# Altium PCB VanAtta_Switch_TB.PcbDoc (part 2 of 2)
Units mil, origin at the board's own origin, x right, y up, seen from the top; angles counter-clockwise.
Board outline 5090 x 7845 mil, 4 copper layers (Top Layer, Int (GND), Int (PWR), Bottom Layer), stack 53.912 mil thick; 128 components, 107 nets, 607 pads, 288 vias.
Unrouted connection lines stored in the file: 160.
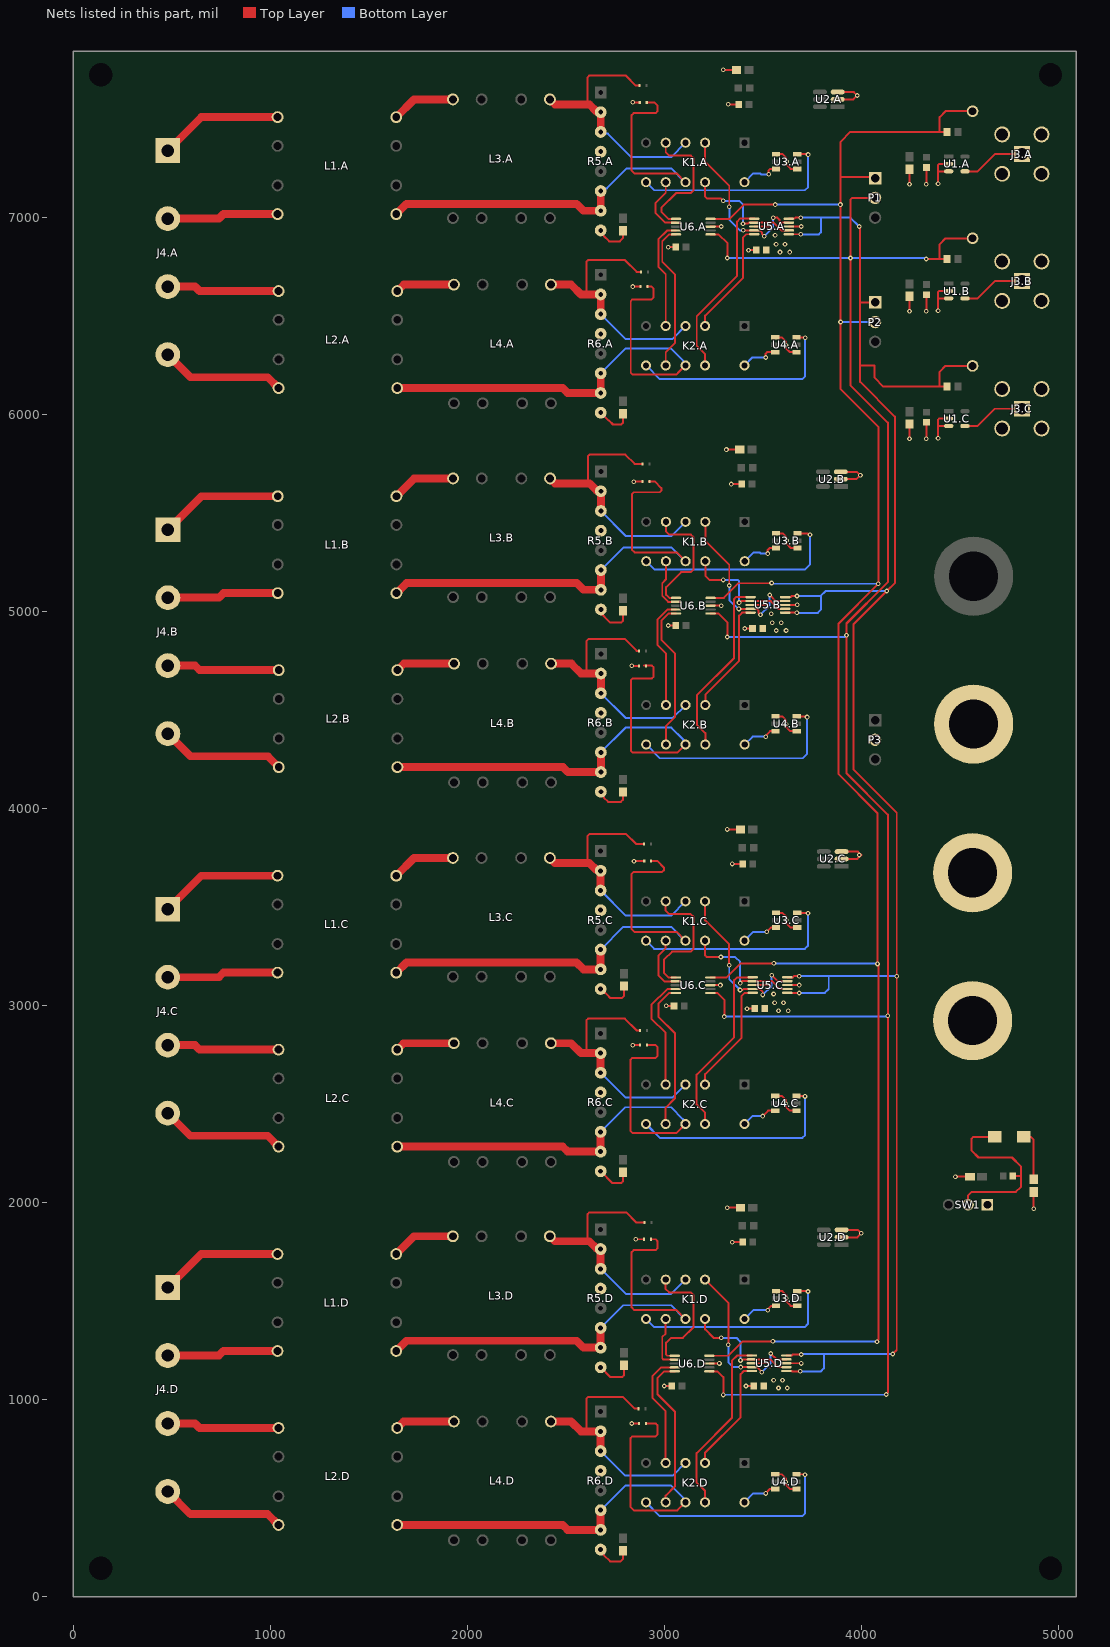
[diagram p4: the nets of this part, all layers, seen from the top]

## Via types
v1: diameter 24, hole 12, Top Layer to Bottom Layer, tented both sides, 288 vias

## Nets (pads, with @x,y where several pads share a name; then routed paths per layer and width w, separated by ;. In a path a pad name is that pad's centre, name@x,y a point inside that pad or via, vN(x,y) a via of type N, cw(c..) or ccw(c..) an arc to the next point about the centre after c; other vN are vias at no path point) (continued)
GND: C1.2 C2.A.2 C2.B.2 C2.C.2 C3.A.1 C3.B.1 C3.C.1 C4.A.2 C4.B.2 C4.C.2 C4.D.2 C5.A.1 C5.B.1 C5.C.1 C5.D.1 C6.A.2 C6.B.2 C6.C.2 C6.D.2 C7.A.2 C7.B.2 C7.C.2 C7.D.2 C8.A.2 C8.B.2 C8.C.2 C8.D.2 C9.A.2 C9.B.2 C9.C.2 C9.D.2 D2.A.2 D2.B.2 D2.C.2 D2.D.2 D4.A.2 D4.B.2 D4.C.2 D4.D.2 J1.2 J2.2 J3.A.2 J3.A.3 J3.A.4 J3.A.5 J3.B.2 J3.B.3 J3.B.4 J3.B.5 J3.C.2 J3.C.3 J3.C.4 J3.C.5 R2.2 R5.A.4 R5.A.8 R5.B.4 R5.B.8 R5.C.4 R5.C.8 R5.D.4 R5.D.8 R6.A.4 R6.A.8 R6.B.4 R6.B.8 R6.C.4 R6.C.8 R6.D.4 R6.D.8 SW1.1 U1.A.2 U1.A.3 U1.B.2 U1.B.3 U1.C.2 U1.C.3 U2.A.2 U2.A.3 U2.B.2 U2.B.3 U2.C.2 U2.C.3 U2.D.2 U2.D.3 U3.A.1 U3.A.4 U3.B.1 U3.B.4 U3.C.1 U3.C.4 U3.D.1 U3.D.4 U4.A.1 U4.A.4 U4.B.1 U4.B.4 U4.C.1 U4.C.4 U4.D.1 U4.D.4 U5.A.3 U5.B.3 U5.C.3 U5.D.3 U6.A.3 U6.B.3 U6.C.3 U6.D.3 | length 6504.2
  Top Layer w10: R6.D.8@2677.36,240 2677.36,228.04 2693.3,212.1 2693.3,211.7 2725,180 2778.47,180 2790,191.53 C7.D.2@2790,235 ; R5.D.8@2677.36,1165 2727.36,1115 2786.21,1115 2795,1123.79 C6.D.2@2795,1175 ; R6.C.8@2677.36,2160 2737.36,2100 2781.21,2100 2790,2108.79 C7.C.2@2790,2155 ; R5.C.8@2677.36,3085 2680,3085 2720.01,3044.99 2725,3040 2786.21,3040 2795,3048.79 C6.C.2@2795,3100 ; R6.A.8@2677.64,6010 2717.64,5970 2720,5970 2740,5950 2781.21,5950 2790,5958.79 C7.A.2@2790,6005 ; R5.A.8@2677.64,6935 2677.64,6923.23 2693.67,6907.19 2693.67,6906.79 2720.46,6880 2774.5,6880 2790,6895.5 C6.A.2@2790,6933.43 ; R6.B.8@2678.39,4086.18 2678.39,4074 2693.23,4059.16 2693.23,4056.77 2715,4035 2780,4035 2790,4045 C7.B.2@2790,4085 ; R5.B.8@2678.39,5011.18 2687,5002.57 2687,4983.2 2708.5,4961.7 2708.5,4961.5 2725,4945 2781.21,4945 2790,4953.79 C6.B.2@2790,5005 ; v1(2835,880) D4.D.2@2872.28,880 ; v1(2835,4725) D4.B.2@2872.28,4725 ; v1(2840,2800) D4.C.2@2877.01,2800 ; v1(2840,6650) D4.A.2@2879.25,6650 ; v1(2840,7585) D2.A.2@2875,7585 ; v1(2845,5660) 2846.18,5661.18 D2.B.2@2890,5661.18 ; v1(2846.89,3733.11) 2849.33,3733.11 2851.22,3735 D2.C.2@2897.83,3735 ; v1(2855,1815) D2.D.2@2897.28,1815 ; v1(2999.74,1070) C9.D.2@3038.78,1070 ; v1(3010.37,3000) C9.C.2@3049.41,3000 ; v1(3020,6850) C9.A.2@3059.41,6850 ; v1(3020.37,4930) C9.B.2@3059.41,4930 ; U6.D.3@3229.37,1184.37 3279.37,1184.37 v1(3280,1185) ; U6.C.3@3234.37,3104.37 3284.37,3104.37 v1(3285,3105) ; U6.B.3@3235,5030.63 3289.37,5030.63 v1(3290,5030) ; U6.A.3@3235,6954.37 3289.37,6954.37 v1(3290,6955) ; v1(3300,7750) C4.A.2@3366.86,7750 ; v1(3315.61,5822.6) C4.B.2@3382.48,5822.6 ; v1(3320,1975) C4.D.2@3386.86,1975 ; v1(3320,3895) C4.C.2@3386.86,3895 ; v1(3325,7575) C5.A.1@3378.82,7575 ; v1(3340.61,5647.6) C5.B.1@3394.43,5647.6 ; v1(3345,1800) C5.D.1@3398.82,1800 ; v1(3345,3720) C5.C.1@3398.82,3720 ; v1(3408.4,4914.37) C8.B.2@3447.81,4914.37 ; v1(3415,1070) C8.D.2@3454.41,1070 ; v1@3425,2985 C8.C.2@3459.41,2985 ; v1@3432.6,6835 C8.A.2@3467.01,6835 ; U4.D.1@3563.23,622.4 3596.76,622.4 3617.36,601.8 v1(3617.4,582.67) 3617.36,568.2 3637.96,547.6 U4.D.4@3671.5,547.6 ; U4.C.1@3563.23,2542.4 3596.76,2542.4 3617.36,2521.8 v1(3617.4,2502.67) 3617.36,2488.2 3637.96,2467.6 U4.C.4@3671.5,2467.6 ; U4.A.1@3563.5,6392.4 3597.04,6392.4 3617.64,6371.8 3617.64,6352.67 3617.64,6338.2 3638.24,6317.6 U4.A.4@3671.77,6317.6 ; U4.B.1@3564.25,4468.58 3597.79,4468.58 3618.39,4447.98 v1(3618.42,4428.85) 3618.39,4414.38 3638.98,4393.78 U4.B.4@3672.52,4393.78 ; U3.D.1@3566.54,1551.81 3600.07,1551.81 3620.67,1531.21 3620.67,1515 3620.67,1497.61 3641.27,1477.01 U3.D.4@3674.8,1477.01 ; U3.C.1@3566.54,3471.81 3600.07,3471.81 3620.67,3451.21 3620.67,3435 3620.67,3417.61 3641.27,3397.01 U3.C.4@3674.8,3397.01 ; U3.A.1@3566.81,7321.81 3600.35,7321.81 3620.94,7301.21 3620.94,7285 3620.94,7267.61 3641.54,7247.01 U3.A.4@3675.08,7247.01 ; U3.B.1@3567.56,5397.99 3601.1,5397.99 3621.69,5377.39 3621.69,5361.18 3621.69,5343.79 3642.29,5323.19 U3.B.4@3675.83,5323.19 ; U5.B.3@3613.4,5034.37 v1@3674.37,5034.37 ; U5.D.3@3620,1185.63 v1@3694.37,1185.63 ; U5.C.3@3625,3105 v1(3685,3105) ; U5.A.3@3632.6,6955 v1(3695,6955) ; U2.A.2@3880.29,7600 3960,7600 v1(3980,7620) 3962.6,7637.4 U2.A.3@3880.29,7637.4 ; U2.B.2@3895.91,5672.6 3975.61,5672.6 v1(3995.61,5692.6) 3978.21,5710 U2.B.3@3895.91,5710 ; U2.D.2@3900.29,1825 3980,1825 v1(4000,1845) 3982.6,1862.4 U2.D.3@3900.29,1862.4 ; U2.C.2@3900.29,3745 3980,3745 3995.05,3760.05 4000,3765 v1@3995.05,3769.95 ; U2.C.3@3900.29,3782.4 3982.6,3782.4 v1@3995.05,3769.95 ; v1(3990.1,3765) v1@3995.05,3769.95 ; v1(4245,5877.56) C2.C.2@4245,5952.56 ; v1(4245,6525) C2.B.2@4245,6600 ; v1(4245,7170) C2.A.2@4245,7245 ; v1(4330,5877.56) C3.C.1@4330,5961.97 ; v1(4330,6525) C3.B.1@4330,6609.41 ; v1(4330,7170) C3.A.1@4330,7254.41 ; v1(4390,5880) 4389.14,5880.86 4389.14,5942.5 ; v1(4390,6527.44) 4389.14,6528.3 4389.14,6589.94 ; v1(4390,7172.44) 4389.14,7173.3 4389.14,7234.94 ; U1.C.3@4443.64,5942.6 4418.92,5942.6 4418.82,5942.5 4389.14,5942.5 ; U1.C.2@4443.64,5980 4395,5980 4389.14,5974.14 4389.14,5942.5 ; U1.B.3@4443.64,6590.04 4418.92,6590.04 4418.82,6589.94 4389.14,6589.94 ; U1.B.2@4443.64,6627.44 4395,6627.44 4389.14,6621.58 4389.14,6589.94 ; U1.A.3@4443.64,7235.04 4418.92,7235.04 4418.82,7234.94 4389.14,7234.94 ; U1.A.2@4443.64,7272.44 4395,7272.44 4389.14,7266.58 4389.14,7234.94 ; v1(4477.75,2132.5) C1.2@4551.3,2132.5 ; v1(4875,1970) R2.2@4875,2054.99
  other v1: 3695,1185 3619.72,1515 3420,2985 3619.72,3435 3675,5035 3620.75,5361.18 3617.68,6352.67 3427.6,6835 3620,7285
"LD1_Signal Processing1": P1.1 P2.2 R3.A.2 TP1.A.1 U6.A.5 U6.B.5 U6.C.5 U6.D.5 | length 10824.4
  Top Layer w10: U6.D.5@3229.37,1223.74 3324.37,1223.74 3397.41,1296.78 v1(3551.52,1296.78) ; U6.C.5@3234.37,3143.74 3316.84,3143.74 3388.1,3215 v1@3557.4,3215 ; U6.B.5@3235,5070 3302.13,5070 3376.5,5144.37 v1@3545.8,5144.37 ; U6.A.5@3235,6993.74 3332,6993.74 3404.41,7066.15 v1(3564.11,7066.15) ; P1.1@4055,7200 4050,7205 3895,7205 ; v1(4080,1295) 4080,1298.79 4086.71,1305.5 v1@4086.71,3212.36 ; v1(4082.29,3212.36) 4082.29,3977.71 3885,4175 3885,4940.07 v1(4086.71,5141.78) 4086.71,5938.29 3895,6130 v1(3895,6470) 3894.56,6470.44 3894.56,7065.71 3895,7066.15 3895,7205 ; R3.A.2@4434.88,7435 4397.48,7435 ; TP1.A.1@4565,7540 4427.56,7540 4397.48,7509.92 4397.48,7435 ; 3895,7205 3895,7385 3945,7435 4397.48,7435
  Bottom Layer w10: v1@3544.92,5141.78 v1(4086.71,5141.78) ; v1(3551.52,1296.78) 3552.41,1295.89 4079.11,1295.89 v1(4080,1295) ; v1(3556.52,3216.15) 3558.41,3214.25 4080.39,3214.25 v1(4082.29,3212.36) ; v1(3564.11,7066.15) v1(3894.11,7066.15) ; v1(3895,6470) P2.2@4070,6470
  other v1: 3544.92,5145.52
"LD2_Signal Processing1": P1.2 R3.B.2 TP1.B.1 U6.A.1 U6.B.1 U6.C.1 U6.D.1 | length 10775.2
  Top Layer w10: U6.D.1@3229.37,1145 3270,1145 3300,1115 v1(3300,1025) ; U6.C.1@3234.37,3065 3270,3065 3305,3030 v1(3305,2945) ; U6.B.1@3235,4991.26 3273.74,4991.26 3321.21,4943.79 3321.21,4872.47 v1(3320,4871.26) ; U6.A.1@3235,6915 3275,6915 3321.21,6868.79 3321.21,6796.21 v1(3320,6795) ; P1.2@4055,7100 3955,7100 3945,7090 v1(3945,6795) 3945,6150 4135,5960 4135,5150 3925,4940 v1(3925,4880) 3925,4180 4135,3970 v1(4135,2950) 4135,1036.88 4126.71,1028.59 v1(4126.71,1026.78) ; v1(4330,6790) 4397.48,6790 ; R3.B.2@4434.88,6790 4397.48,6790 ; TP1.B.1@4565,6895 4427.56,6895 4397.48,6864.92 4397.48,6790
  Bottom Layer w10: v1(3300,1025) 3300.89,1025.89 4125.82,1025.89 v1@4126.71,1025 ; v1(3305,2945) 4126.21,2945 4131.21,2950 v1(4135,2950) ; v1(3320,4871.26) 3915.36,4871.26 3924.1,4880 v1(3925,4880) ; v1(3320,6795) v1(3945,6795) 4321.21,6795 4326.21,6790 v1(4330,6790)
LED: LED1.1 R2.1 | length 256.5
  Top Layer w10: LED1.1@4825,2335 4860.45,2335 4875,2320.45 R2.1@4875,2120
"N1+_Input and Relays1": D1.A.2 K1.A.4 L3.A.5 R5.A.2 R5.A.3 | length 1327
  Top Layer w10: 2620,7575 2611.23,7583.77 2611.23,7712.44 2620.02,7721.23 2803.77,7721.23 2855,7670 D1.A.2@2874.57,7670
  Top Layer w40: L3.A.5@2419.76,7600 2444.76,7575 2620,7575 2656.17,7538.83 2673.81,7538.83 R5.A.2@2677.64,7535 R5.A.3@2677.64,7435
  Bottom Layer w10: R5.A.3@2677.64,7435 2686.25,7426.39 2713.61,7426.39 2832.64,7307.36 3035,7307.36 K1.A.4@3107.64,7380
"N1+_Input and Relays2": D1.B.2 K1.B.4 L3.B.5 R5.B.2 R5.B.3 | length 1339.7
  Top Layer w10: 2620.75,5651.18 2611.98,5659.95 2611.98,5788.62 2620.76,5797.41 2802.59,5797.41 2850,5750 D1.B.2@2889.57,5750
  Top Layer w40: L3.B.5@2420.51,5676.18 2445.51,5651.18 2620.75,5651.18 2656.92,5615.01 2674.56,5615.01 R5.B.2@2678.39,5611.18 R5.B.3@2678.39,5511.18
  Bottom Layer w10: R5.B.3@2678.39,5511.18 2806.02,5383.54 3035.75,5383.54 K1.B.4@3108.39,5456.18
"N1+_Input and Relays3": D1.C.2 K1.C.4 L3.C.5 R5.C.2 R5.C.3 | length 1350.4
  Top Layer w10: 2619.72,3725 2610.95,3733.77 2610.95,3862.44 2619.74,3871.23 2806.76,3871.23 2857.01,3820.98 2857.01,3820.37 2890,3820.37 2890.38,3820 D1.C.2@2897.28,3820
  Top Layer w40: L3.C.5@2419.49,3750 2444.49,3725 2619.72,3725 2655.9,3688.83 2673.54,3688.83 R5.C.2@2677.36,3685 R5.C.3@2677.36,3585
  Bottom Layer w10: R5.C.3@2677.36,3585 2805,3457.36 3034.72,3457.36 K1.C.4@3107.36,3530
"N1+_Input and Relays4": D1.D.2 K1.D.4 L3.D.5 R5.D.2 R5.D.3 | length 1352.3
  Top Layer w10: 2619.72,1805 2610.95,1813.77 2610.95,1942.44 2619.74,1951.23 2806.76,1951.23 2857.99,1900 D1.D.2@2899.57,1900
  Top Layer w40: L3.D.5@2419.49,1830 2444.49,1805 2619.72,1805 2655.9,1768.83 2673.54,1768.83 R5.D.2@2677.36,1765 R5.D.3@2677.36,1665
  Bottom Layer w10: R5.D.3@2677.36,1665 2805,1537.36 3034.72,1537.36 K1.D.4@3107.36,1610
"N1+_iso_Input and Relays1": J4.A.1 L1.A.1 | length 627.8
  Top Layer w40: J4.A.1@480.28,7340 650.28,7510 L1.A.1@1037.64,7510
"N1+_iso_Input and Relays2": J4.B.1 L1.B.1 | length 627.8
  Top Layer w40: J4.B.1@481.02,5416.18 651.02,5586.18 L1.B.1@1038.39,5586.18
"N1+_iso_Input and Relays3": J4.C.1 L1.C.1 | length 627.8
  Top Layer w40: J4.C.1@480,3490 650,3660 L1.C.1@1037.36,3660
"N1+_iso_Input and Relays4": J4.D.1 L1.D.1 | length 627.8
  Top Layer w40: J4.D.1@480,1570 650,1740 L1.D.1@1037.36,1740
"N1+L_Input and Relays1": K1.A.5 U6.A.6 | length 674.2
  Top Layer w10: K1.A.5@3007.64,7380 3007.64,7332.36 3025,7315 3134.76,7315 3148.73,7301.03 3148.73,7138.97 3134.76,7125 3060,7125 2985,7050 2985,7030 3021.26,6993.74 U6.A.6@3059.8,6993.74
"N1+L_Input and Relays2": K1.B.5 U6.B.6 | length 636.3
  Top Layer w10: K1.B.5@3008.39,5456.18 3008.39,5408.54 3025.75,5391.18 3135.51,5391.18 3149.48,5377.21 3149.48,5215.15 3135.51,5201.18 3086.18,5201.18 3010,5125 3010,5085.46 3025.46,5070 U6.B.6@3059.8,5070
"N1+L_Input and Relays3": K1.C.5 U6.C.6 | length 672.6
  Top Layer w10: K1.C.5@3007.36,3530 3007.36,3482.36 3024.72,3465 3134.48,3465 3148.45,3451.03 3148.45,3288.97 3134.48,3275 3040,3275 3000,3235 3000,3165 3021.26,3143.74 U6.C.6@3059.17,3143.74
"N1+L_Input and Relays4": K1.D.5 U6.D.6 | length 641.9
  Top Layer w10: K1.D.5@3007.36,1610 3007.36,1562.36 3024.72,1545 3134.48,1545 3148.45,1531.03 3148.45,1368.97 3094.48,1315 3035,1315 3010,1290 3010,1229.6 3015.86,1223.74 U6.D.6@3054.17,1223.74
"N1+VA_Input and Relays1": K1.A.3 U5.A.4 U5.A.9 | length 866.7
  Top Layer w10: K1.A.3@3207.64,7380 3207.64,7283.79 3330,7161.42 v1@3330,7055 ; v1@3400.94,6935.31 3485.12,6935.31 3496.98,6923.46 3496.98,6915.62 v1(3507.6,6905) ; v1(3552.6,6999.68) 3574.46,6999.68 3585,6989.14 3585,6980.54 3590.86,6974.68 U5.A.4@3632.6,6974.68
  Bottom Layer w10: v1(3330.63,7055.63) 3330.63,6989.37 3384.37,6935.63 v1(3400.63,6935.63) ; v1(3507.6,6905) 3552.6,6950 v1(3552.6,6999.68)
"N1+VA_Input and Relays2": K1.B.3 U5.B.4 U5.B.9 | length 854.4
  Top Layer w10: K1.B.3@3208.39,5456.18 3208.39,5359.97 3330,5238.35 3330,5133.22 v1(3329.65,5132.87) ; v1@3379.47,5014.68 3469.69,5014.68 3477.78,5006.59 3477.78,4994.99 v1(3488.4,4984.37) ; v1(3535,5085) 3535.46,5085 3566.4,5054.06 U5.B.4@3613.4,5054.06
  Bottom Layer w10: v1(3329.65,5132.87) 3330.63,5131.89 3330.63,5059.01 3375.44,5014.21 v1(3378.99,5014.21) ; v1(3488.4,4984.37) 3535,5030.97 v1(3535,5085)
"N1+VA_Input and Relays3": K1.C.3 U5.C.4 U5.C.9 | length 873.8
  Top Layer w10: K1.C.3@3207.36,3530 3207.36,3433.79 3329.72,3311.42 v1@3329.72,3205 ; v1(3385,3080) 3385.73,3080.73 3398,3080.73 3402.58,3085.31 U5.C.9@3449.8,3085.31 3477.38,3085.31 3477.69,3085 3485,3085 3500,3070 v1(3500,3055) ; v1(3545,3155) 3575.31,3124.69 U5.C.4@3625,3124.69
  Bottom Layer w10: v1(3330,3205.63) 3330,3135 v1(3385,3080) ; v1(3500,3055) 3545,3100 v1(3545,3155)
"N1+VA_Input and Relays4": K1.D.3 U5.D.4 U5.D.9 | length 865.9
  Top Layer w10: K1.D.3@3207.36,1610 3325,1492.36 v1(3325,1280) ; v1@3388.35,1165.94 U5.D.9@3444.8,1165.94 3472.52,1165.94 3495,1143.47 v1(3495,1140) ; v1(3540,1235) 3569.69,1205.31 U5.D.4@3620,1205.31
  Bottom Layer w10: v1(3325,1280) 3325,1191.87 3350.61,1166.26 v1(3388.03,1166.26) ; v1(3495,1140) 3540,1185 v1(3540,1235)
"N1- L_Input and Relays1": D2.A.1 K1.A.9 L1.A.5 R5.A.6 R5.A.7 | length 2486.4
  Top Layer w10: D2.A.1@2912.4,7585 2950,7585 2965,7570 2965,7538.79 2956.21,7530 2845,7530 2835,7520 2835,7238.79 2848.79,7225 3062.64,7225 K1.A.9@3107.64,7180
  Top Layer w40: L1.A.5@1640,7017.87 1692.13,7070 2555,7070 2590,7035 R5.A.7@2677.64,7035 R5.A.6@2677.64,7135
  Bottom Layer w10: R5.A.6@2677.64,7135 2689.81,7135 2703.26,7148.44 2708.44,7148.44 2810,7250 3035,7250 3105,7180 K1.A.9@3107.64,7180
"N1- L_Input and Relays2": D2.B.1 K1.B.9 L1.B.5 R5.B.6 R5.B.7 | length 2505.6
  Top Layer w10: D2.B.1@2921.96,5661.18 D2.B.1@2924.45,5661.18 ; D2.B.1@2925.43,5661.18 2952,5661.18 2985.79,5627.39 2985.79,5614.97 2977,5606.18 2845.75,5606.18 2835.75,5596.18 2835.75,5314.97 2849.53,5301.18 3063.39,5301.18 K1.B.9@3108.39,5256.18
  Top Layer w40: L1.B.5@1640.75,5094.06 1692.87,5146.18 2555.75,5146.18 2590.75,5111.18 R5.B.7@2678.39,5111.18 R5.B.6@2678.39,5211.18
  Bottom Layer w10: R5.B.6@2678.39,5211.18 2793.39,5326.18 3035.75,5326.18 3105.75,5256.18 K1.B.9@3108.39,5256.18
"N1- L_Input and Relays3": D2.C.1 K1.C.9 L1.C.5 R5.C.6 R5.C.7 | length 2524.3
  Top Layer w10: D2.C.1@2933.26,3735 2932.28,3735 2965,3735 2998.79,3701.21 2998.79,3688.79 2990,3680 2844.72,3680 2834.72,3670 2834.72,3388.79 2848.51,3375 3062.36,3375 K1.C.9@3107.36,3330
  Top Layer w40: L1.C.5@1639.72,3167.87 1691.85,3220 2554.72,3220 2589.72,3185 R5.C.7@2677.36,3185 R5.C.6@2677.36,3285
  Bottom Layer w10: R5.C.6@2677.36,3285 2792.36,3400 3034.72,3400 3104.72,3330 K1.C.9@3107.36,3330
"N1- L_Input and Relays4": D2.D.1 K1.D.9 L1.D.5 R5.D.6 R5.D.7 | length 2470
  Top Layer w10: D2.D.1@2932.72,1815 2956.21,1815 2965,1806.21 2965,1768.79 2956.21,1760 2844.72,1760 2834.72,1750 2834.72,1468.79 2848.51,1455 3062.36,1455 K1.D.9@3107.36,1410
  Top Layer w40: L1.D.5@1639.72,1247.87 1691.85,1300 2554.72,1300 2589.72,1265 R5.D.7@2677.36,1265 R5.D.6@2677.36,1365
  Bottom Layer w10: R5.D.6@2677.36,1365 2792.36,1480 3034.72,1480 3104.72,1410 K1.D.9@3107.36,1410
"N1-_iso_Input and Relays1": J4.A.2 L1.A.4 | length 566.8
  Top Layer w40: J4.A.2@480.28,6995 740,6995 762.87,7017.87 L1.A.4@1037.64,7017.87
"N1-_iso_Input and Relays2": J4.B.2 L1.B.4 | length 566.8
  Top Layer w40: J4.B.2@481.02,5071.18 740.75,5071.18 763.62,5094.06 L1.B.4@1038.39,5094.06
"N1-_iso_Input and Relays3": J4.C.2 L1.C.4 | length 566.8
  Top Layer w40: J4.C.2@480,3145 739.72,3145 762.6,3167.87 L1.C.4@1037.36,3167.87
"N1-_iso_Input and Relays4": J4.D.2 L1.D.4 | length 566.8
  Top Layer w40: J4.D.2@480,1225 739.72,1225 762.6,1247.87 L1.D.4@1037.36,1247.87
"N1-L_Input and Relays1": K1.A.8 U6.A.7 | length 302.7
  Top Layer w10: K1.A.8@3007.64,7180 3007.64,7126.72 2955,7074.08 2955,7025 3005.95,6974.06 U6.A.7@3059.8,6974.06
"N1-L_Input and Relays2": K1.B.8 U6.B.7 | length 265.9
  Top Layer w10: K1.B.8@3008.39,5256.18 3008.39,5163.39 2990,5145 2990,5080 3019.69,5050.31 U6.B.7@3059.8,5050.31
"N1-L_Input and Relays3": K1.C.8 U6.C.7 | length 292.5
  Top Layer w10: K1.C.8@3007.36,3330 3007.36,3292.36 2970,3255 2970,3155 3000.95,3124.06 U6.C.7@3059.17,3124.06
"N1-L_Input and Relays4": K1.D.8 U6.D.7 | length 273.9
  Top Layer w10: K1.D.8@3007.36,1410 3007.36,1336.42 2990,1319.06 2990,1209.91 2995.86,1204.06 U6.D.7@3054.17,1204.06
"N1-VA_Input and Relays1": K1.A.10 U5.A.2 U5.A.7 | length 630
  Top Layer w10: K1.A.10@3207.64,7180 3207.64,7106.15 3216.42,7097.36 3287.64,7097.36 v1(3300,7085) ; v1(3400,6969.37) 3401,6970.37 3425.51,6970.37 3429.83,6974.68 U5.A.7@3457.4,6974.68 3555.31,6974.68 3594.69,6935.31 U5.A.2@3632.6,6935.31
  Bottom Layer w10: v1(3300,7085) 3380,7085 3400,7065 v1(3400,6969.37)
"N1-VA_Input and Relays2": K1.B.10 U5.B.2 U5.B.7 | length 620.6
  Top Layer w10: K1.B.10@3208.39,5256.18 3208.39,5182.33 3229.46,5161.26 v1(3300,5161.26) ; v1(3380,5046.19) 3382.65,5046.19 3390.52,5054.06 U5.B.7@3438.2,5054.06 3540.94,5054.06 3580.31,5014.68 U5.B.2@3613.4,5014.68
  Bottom Layer w10: v1@3297.6,5160.63 3374.14,5160.63 3380,5154.77 v1(3380,5046.19)
"N1-VA_Input and Relays3": K1.C.10 U5.C.2 U5.C.7 | length 632.8
  Top Layer w10: K1.C.10@3207.36,3330 3207.36,3256.15 3216.15,3247.36 v1(3287.64,3247.36) ; v1(3385.18,3115.18) 3394.69,3124.69 U5.C.7@3449.8,3124.69 3547.81,3124.69 3587.19,3085.31 U5.C.2@3625,3085.31
  Bottom Layer w10: v1(3287.64,3247.36) 3360.04,3247.36 3385.18,3222.22 v1(3385.18,3115.18)
"N1-VA_Input and Relays4": K1.D.10 U5.D.2 U5.D.7 | length 604.8
  Top Layer w10: K1.D.10@3207.36,1410 3207.36,1357.64 3250,1315 v1(3290,1315) ; v1(3387.4,1200) 3391.19,1200 3396.5,1205.31 U5.D.7@3444.8,1205.31 3538.17,1205.31 3577.54,1165.94 U5.D.2@3620,1165.94
  Bottom Layer w10: v1(3290,1315) 3366.77,1315 3386.14,1295.63 3387.4,1295.63 v1(3387.4,1200)
"N2+_iso_Input and Relays1": J4.A.3 L2.A.1 | length 571.8
  Top Layer w40: J4.A.3@480.28,6650 618.59,6650 641.47,6627.13 L2.A.1@1042.64,6627.13
"N2+_iso_Input and Relays2": J4.B.3 L2.B.1 | length 571.8
  Top Layer w40: J4.B.3@481.02,4726.18 619.34,4726.18 642.22,4703.31 L2.B.1@1043.39,4703.31
"N2+_iso_Input and Relays3": J4.C.3 L2.C.1 | length 571.8
  Top Layer w40: J4.C.3@480,2800 618.32,2800 641.19,2777.13 L2.C.1@1042.36,2777.13
"N2+_iso_Input and Relays4": J4.D.3 L2.D.1 | length 571.8
  Top Layer w40: J4.D.3@480,880 618.32,880 641.19,857.13 L2.D.1@1042.36,857.13
"N2+L_Input and Relays1": K2.A.5 U6.A.9 | length 563.9
  Top Layer w10: K2.A.5@3007.64,6450 3007.64,6712.36 2970,6750 2970,6890 3014.68,6934.68 U6.A.9@3059.8,6934.68
"N2+L_Input and Relays2": K2.B.5 U6.B.9 | length 567.4
  Top Layer w10: K2.B.5@3008.39,4526.18 3008.39,4788.54 2965,4831.93 2965,4959.53 3016.42,5010.94 U6.B.9@3059.8,5010.94
"N2+L_Input and Relays3": K2.C.5 U6.C.9 | length 591.8
  Top Layer w10: K2.C.5@3007.36,2600 3007.36,2862.36 2935,2934.72 2935,3004.37 3015.32,3084.69 U6.C.9@3059.17,3084.69
"N2+L_Input and Relays4": K2.D.5 U6.D.9 | length 600.6
  Top Layer w10: K2.D.5@3007.36,680 3007.36,942.36 2940,1009.72 2940,1120 2984.68,1164.69 U6.D.9@3054.17,1164.69
"N2+VA_Input and Relays1": K2.A.3 U5.A.10 | length 593.6
  Top Layer w10: K2.A.3@3207.64,6450 3207.64,6502.64 3400,6695 3400,6900 3415.63,6915.63 U5.A.10@3457.4,6915.63
"N2+VA_Input and Relays2": K2.B.3 U5.B.10 | length 589.3
  Top Layer w10: K2.B.3@3208.39,4526.18 3208.39,4578.39 3380,4750 3380,4980 3395,4995 U5.B.10@3438.2,4995
"N2+VA_Input and Relays3": K2.C.3 U5.C.10 | length 590.3
  Top Layer w10: K2.C.3@3207.36,2600 3207.36,2652.64 3392.72,2838 3392.72,3050 3408.35,3065.63 U5.C.10@3449.8,3065.63
"N2+VA_Input and Relays4": K2.D.3 U5.D.10 | length 589.1
  Top Layer w10: K2.D.3@3207.36,680 3207.36,732.64 3387.4,912.68 3387.4,1130.63 3403.03,1146.26 U5.D.10@3444.8,1146.26
"N2-_Input and Relays1": D4.A.1 K2.A.9 L2.A.5 R6.A.6 R6.A.7 | length 2534.2
  Top Layer w10: D4.A.1@2913.7,6650 D4.A.1@2914.68,6650 2936.21,6650 2945,6641.21 2945,6593.79 2936.21,6585 2838.79,6585 2830,6576.21 2830,6213.79 2838.79,6205 3062.64,6205 3074.15,6216.51 K2.A.9@3107.64,6250
  Top Layer w40: L2.A.5@1645,6135 2485,6135 2510,6110 R6.A.7@2677.64,6110 R6.A.6@2677.64,6210
  Bottom Layer w10: R6.A.6@2677.64,6210 2802.64,6335 3035,6335 3094.81,6275.19 3094.81,6272.61 3107.64,6259.79 K2.A.9@3107.64,6250
"N2-_Input and Relays2": D4.B.1 K2.B.9 L2.B.5 R6.B.6 R6.B.7 | length 2545.5
  Top Layer w10: 2897.72,4726.18 2936.96,4726.18 2945.75,4717.39 2945.75,4669.97 2936.96,4661.18 2839.53,4661.18 2830.75,4652.39 2830.75,4293.79 2839.53,4285 3067.2,4285 K2.B.9@3108.39,4326.18
  Top Layer w40: L2.B.5@1645.75,4211.18 2485.75,4211.18 2510.75,4186.18 R6.B.7@2678.39,4186.18 R6.B.6@2678.39,4286.18
  Bottom Layer w10: R6.B.6@2678.39,4286.18 2803.39,4411.18 3035.75,4411.18 3095.56,4351.37 3095.56,4348.8 3108.39,4335.97 K2.B.9@3108.39,4326.18
"N2-_Input and Relays3": D4.C.1 K2.C.9 L2.C.5 R6.C.6 R6.C.7 | length 2576.7
  Top Layer w10: D4.C.1@2911.46,2800 D4.C.1@2912.44,2800 2956.21,2800 2965,2791.21 2965,2743.79 2956.21,2735 2838.51,2735 2829.72,2726.21 2829.72,2363.79 2838.51,2355 3062.36,2355 K2.C.9@3107.36,2400
  Top Layer w40: L2.C.5@1644.72,2285 2484.72,2285 2509.72,2260 R6.C.7@2677.36,2260 R6.C.6@2677.36,2360
  Bottom Layer w10: R6.C.6@2677.36,2360 2802.36,2485 3034.72,2485 3094.54,2425.19 3094.54,2422.61 3107.36,2409.79 K2.C.9@3107.36,2400
"N2-_Input and Relays4": D4.D.1 K2.D.9 L2.D.5 R6.D.6 R6.D.7 | length 2570.5
  Top Layer w10: D4.D.1@2907.72,880 2956.21,880 2965,871.21 2965,823.79 2956.21,815 2838.51,815 2829.72,806.21 2829.72,455.3 2846.12,438.91 3066.27,438.91 K2.D.9@3107.36,480
  Top Layer w40: L2.D.5@1644.72,365 2484.72,365 2509.72,340 R6.D.7@2677.36,340 R6.D.6@2677.36,440
  Bottom Layer w10: R6.D.6@2677.36,440 2802.36,565 3034.72,565 3094.54,505.19 3094.54,502.61 3107.36,489.79 K2.D.9@3107.36,480
"N2-_iso_Input and Relays1": J4.A.4 L2.A.4 | length 632.8
  Top Layer w40: J4.A.4@480.28,6305 595.28,6190 987.64,6190 L2.A.4@1042.64,6135
"N2-_iso_Input and Relays2": J4.B.4 L2.B.4 | length 632.8
  Top Layer w40: J4.B.4@481.02,4381.18 596.02,4266.18 988.39,4266.18 L2.B.4@1043.39,4211.18
"N2-_iso_Input and Relays3": J4.C.4 L2.C.4 | length 632.8
  Top Layer w40: J4.C.4@480,2455 595,2340 987.36,2340 L2.C.4@1042.36,2285
"N2-_iso_Input and Relays4": J4.D.4 L2.D.4 | length 632.8
  Top Layer w40: J4.D.4@480,535 595,420 987.36,420 L2.D.4@1042.36,365
"N2-L_Input and Relays1": K2.A.8 U6.A.10 | length 760.8
  Top Layer w10: K2.A.8@3007.64,6250 3007.64,6317.64 3055,6365 3055,6710 2990,6775 2990,6880 3025,6915 U6.A.10@3059.8,6915
"N2-L_Input and Relays2": K2.B.8 U6.B.10 | length 767
  Top Layer w10: K2.B.8@3008.39,4326.18 3008.39,4418.39 3055.75,4465.75 3055.75,4786.18 2985,4856.93 2985,4954.07 3022.19,4991.26 U6.B.10@3059.8,4991.26
"N2-L_Input and Relays3": K2.C.8 U6.C.10 | length 776.7
  Top Layer w10: K2.C.8@3007.36,2400 3007.36,2482.36 3054.72,2529.72 3054.72,2860 2970,2944.72 2970,3010 3025,3065 U6.C.10@3059.17,3065
"N2-L_Input and Relays4": K2.D.8 U6.D.10 | length 790.5
  Top Layer w10: K2.D.8@3007.36,480 3007.36,513.89 3054.72,561.25 3054.72,940 2965,1029.72 2965,1110 3000,1145 U6.D.10@3054.17,1145
"N2-VA_Input and Relays1": K2.A.10 U5.A.6 | length 925.9
  Top Layer w10: K2.A.10@3207.64,6250 3207.64,6307.36 3165,6350 3165,6500 3370,6705 3370,6980 3384.37,6994.37 U5.A.6@3457.4,6994.37
"N2-VA_Input and Relays2": K2.B.10 U5.B.6 | length 921.7
  Top Layer w10: K2.B.10@3208.39,4326.18 3208.39,4383.54 3165.75,4426.18 3165.75,4576.18 3353.99,4764.43 3353.99,5064 3363.74,5073.74 U5.B.6@3438.2,5073.74
"N2-VA_Input and Relays3": K2.C.10 U5.C.6 | length 927.2
  Top Layer w10: K2.C.10@3207.36,2400 3207.36,2457.36 3164.72,2500 3164.72,2650 3355,2840.28 3355,3129.95 3369.42,3144.37 U5.C.6@3449.8,3144.37
"N2-VA_Input and Relays4": K2.D.10 U5.D.6 | length 922.6
  Top Layer w10: K2.D.10@3207.36,480 3207.36,537.36 3164.72,580 3164.72,730 3345.1,910.37 3345.1,1099.9 3345,1100 3345,1200.1 3369.9,1225 U5.D.6@3444.8,1225
NetD3.A_2: D3.A.2 K2.A.4 L4.A.5 R6.A.2 R6.A.3 | length 1356.3
  Top Layer w10: 2610,6610 2605.04,6614.96 2605.04,6776.21 2613.83,6785 2800,6785 2860,6725 D3.A.2@2882.28,6725
  Top Layer w40: L4.A.5@2424.76,6660 2527.64,6660 2577.64,6610 2610,6610 R6.A.2@2677.64,6610 R6.A.3@2677.64,6510
  Bottom Layer w10: R6.A.3@2677.64,6510 2802.64,6385 3042.64,6385 K2.A.4@3107.64,6450
NetD3.B_2: D3.B.2 K2.B.4 L4.B.5 R6.B.2 R6.B.3 | length 1346.4
  Top Layer w10: 2610.75,4686.18 2605.79,4691.14 2605.79,4852.39 2614.58,4861.18 2801.3,4861.18 2860.32,4802.17 2860.32,4801.56 2863.82,4801.56 2865.38,4800 D3.B.2@2872.28,4800
  Top Layer w40: L4.B.5@2425.51,4736.18 2528.39,4736.18 2578.39,4686.18 2610.75,4686.18 R6.B.2@2678.39,4686.18 R6.B.3@2678.39,4586.18
  Bottom Layer w10: R6.B.3@2678.39,4586.18 2803.39,4461.18 3043.39,4461.18 K2.B.4@3108.39,4526.18
NetD3.C_2: D3.C.2 K2.C.4 L4.C.5 R6.C.2 R6.C.3 | length 1351.9
  Top Layer w10: 2609.72,2760 2604.77,2764.96 2604.77,2926.21 2613.55,2935 2800.28,2935 2859.29,2875.98 2859.29,2875.37 2859.67,2875 D3.C.2@2877.28,2875
  Top Layer w40: L4.C.5@2424.49,2810 2527.36,2810 2577.36,2760 2609.72,2760 R6.C.2@2677.36,2760 R6.C.3@2677.36,2660
  Bottom Layer w10: R6.C.3@2677.36,2660 2802.36,2535 3042.36,2535 K2.C.4@3107.36,2600
NetD3.D_2: D3.D.2 K2.D.4 L4.D.5 R6.D.2 R6.D.3 | length 1343.8
  Top Layer w10: 2609.72,840 2604.77,844.96 2604.77,1006.21 2613.55,1015 2790,1015 2850,955 D3.D.2@2869.57,955
  Top Layer w40: L4.D.5@2424.49,890 2527.36,890 2577.36,840 2609.72,840 R6.D.2@2677.36,840 R6.D.3@2677.36,740
  Bottom Layer w10: R6.D.3@2677.36,740 2802.36,615 3042.36,615 K2.D.4@3107.36,680
"Node 1+_Input and Relays1": L1.A.8 L3.A.8 | length 324.9
  Top Layer w40: L1.A.8@1640,7510 1730,7600 L3.A.8@1927.64,7600
"Node 1+_Input and Relays2": L1.B.8 L3.B.8 | length 324.9
  Top Layer w40: L1.B.8@1640.75,5586.18 1730.75,5676.18 L3.B.8@1928.39,5676.18
"Node 1+_Input and Relays3": L1.C.8 L3.C.8 | length 324.9
  Top Layer w40: L1.C.8@1639.72,3660 1729.72,3750 L3.C.8@1927.36,3750
"Node 1+_Input and Relays4": L1.D.8 L3.D.8 | length 324.9
  Top Layer w40: L1.D.8@1639.72,1740 1729.72,1830 L3.D.8@1927.36,1830
"Node 2+_Input and Relays1": L2.A.8 L4.A.8 | length 301.3
  Top Layer w40: L2.A.8@1645,6627.13 1677.87,6660 L4.A.8@1932.64,6660
"Node 2+_Input and Relays2": L2.B.8 L4.B.8 | length 301.3
  Top Layer w40: L2.B.8@1645.75,4703.31 1678.62,4736.18 L4.B.8@1933.39,4736.18
"Node 2+_Input and Relays3": L2.C.8 L4.C.8 | length 301.3
  Top Layer w40: L2.C.8@1644.72,2777.13 1677.6,2810 L4.C.8@1932.36,2810
"Node 2+_Input and Relays4": L2.D.8 L4.D.8 | length 301.3
  Top Layer w40: L2.D.8@1644.72,857.13 1677.6,890 L4.D.8@1932.36,890
"Reset Coil N1_Input and Relays1": K1.A.7 U3.A.6 | length 1066.7
  Top Layer w10: U3.A.6@3675.08,7321.81 3728.19,7321.81 v1(3730,7320)
  Bottom Layer w10: K1.A.7@2907.64,7180 2948.73,7138.91 3713.91,7138.91 3730,7155 v1(3730,7320)
"Reset Coil N1_Input and Relays2": K1.B.7 U3.B.6 | length 1076.2
  Top Layer w10: U3.B.6@3675.83,5397.99 3728.22,5397.99 3736.21,5390 v1(3740,5390)
  Bottom Layer w10: K1.B.7@2908.39,5256.18 2949.48,5215.09 3714.66,5215.09 3740,5240.43 v1(3740,5390)
"Reset Coil N1_Input and Relays3": K1.C.7 U3.C.6 | length 1066.7
  Top Layer w10: U3.C.6@3674.8,3471.81 3727.91,3471.81 v1(3729.72,3470)
  Bottom Layer w10: K1.C.7@2907.36,3330 2948.45,3288.91 3713.63,3288.91 3729.72,3305 v1(3729.72,3470)
"Reset Coil N1_Input and Relays4": K1.D.7 U3.D.6 | length 1066.7
  Top Layer w10: U3.D.6@3674.8,1551.81 3727.91,1551.81 v1(3729.72,1550)
  Bottom Layer w10: K1.D.7@2907.36,1410 2948.45,1368.91 3713.63,1368.91 3729.72,1385 v1(3729.72,1550)
"Reset Coil N2_Input and Relays1": K2.A.7 U4.A.6 | length 1082.5
  Top Layer w10: U4.A.6@3671.77,6392.4 3712.6,6392.4 v1(3715,6390)
  Bottom Layer w10: K2.A.7@2907.64,6250 2977.64,6180 3701.21,6180 3715,6193.79 v1(3715,6390)
"Reset Coil N2_Input and Relays2": K2.B.7 U4.B.6 | length 1094.9
  Top Layer w10: U4.B.6@3672.52,4468.58 3717.63,4468.58 3721.21,4465 v1(3725,4465)
  Bottom Layer w10: K2.B.7@2908.39,4326.18 2978.39,4256.18 3701.96,4256.18 3725,4279.22 v1(3725,4465)
"Reset Coil N2_Input and Relays3": K2.C.7 U4.C.6 | length 1082.5
  Top Layer w10: U4.C.6@3671.5,2542.4 3712.32,2542.4 v1(3714.72,2540)
  Bottom Layer w10: K2.C.7@2907.36,2400 2977.36,2330 3700.94,2330 3714.72,2343.79 v1(3714.72,2540)
"Reset Coil N2_Input and Relays4": K2.D.7 U4.D.6 | length 1082.5
  Top Layer w10: U4.D.6@3671.5,622.4 3712.32,622.4 v1(3714.72,620)
  Bottom Layer w10: K2.D.7@2907.36,480 2977.36,410 3700.94,410 3714.72,423.79 v1(3714.72,620)
"Set Coil N1_Input and Relays1": K1.A.12 U3.A.3 | length 221.3
  Top Layer w10: v1(3530,7220) 3530,7240.03 3536.98,7247.01 U3.A.3@3585.32,7247.01
  Bottom Layer w10: K1.A.12@3407.64,7180 3452.64,7225 3486.92,7225 3491.92,7220 v1(3530,7220)
"Set Coil N1_Input and Relays2": K1.B.12 U3.B.3 | length 202.6
  Top Layer w10: v1(3525,5295) 3525,5313.07 3535.12,5323.19 U3.B.3@3567.56,5323.19
  Bottom Layer w10: K1.B.12@3408.39,5256.18 3453.39,5301.18 3484.21,5301.18 3490.39,5295 v1(3525,5295)
"Set Coil N1_Input and Relays3": K1.C.12 U3.C.3 | length 201.4
  Top Layer w10: v1(3520,3375) 3520,3376.4 3540.61,3397.01 3576,3397.01 U3.C.3@3578.99,3400
  Bottom Layer w10: K1.C.12@3407.36,3330 3452.36,3375 v1(3520,3375)
"Set Coil N1_Input and Relays4": K1.D.12 U3.D.3 | length 189.4
  Top Layer w10: v1(3525,1455) 3527.68,1457.68 3527.68,1461.81 3542.87,1477.01 U3.D.3@3566.54,1477.01
  Bottom Layer w10: K1.D.12@3407.36,1410 3452.36,1455 v1(3525,1455)
"Set Coil N2_Input and Relays1": K2.A.12 U4.A.3 | length 195.6
  Top Layer w10: v1(3515,6290) 3515,6310 3522.6,6317.6 U4.A.3@3563.5,6317.6
  Bottom Layer w10: K2.A.12@3407.64,6250 3447.64,6290 v1(3515,6290)
"Set Coil N2_Input and Relays2": K2.B.12 U4.B.3 | length 188.4
  Top Layer w10: v1(3515,4365) 3517.68,4367.68 3517.68,4373.73 3537.72,4393.78 U4.B.3@3564.25,4393.78
  Bottom Layer w10: K2.B.12@3408.39,4326.18 3448.39,4366.18 3513.82,4366.18 v1(3515,4365)
"Set Coil N2_Input and Relays3": K2.C.12 U4.C.3 | length 183.9
  Top Layer w10: v1(3500,2440) 3527.6,2467.6 U4.C.3@3563.23,2467.6
  Bottom Layer w10: K2.C.12@3407.36,2400 3447.36,2440 v1(3500,2440)
"Set Coil N2_Input and Relays4": K2.D.12 U4.D.3 | length 184.4
  Top Layer w10: v1(3515,525) 3515,525.9 3536.7,547.6 U4.D.3@3563.23,547.6
  Bottom Layer w10: K2.D.12@3407.36,480 3452.36,525 v1(3515,525)
"Signal_In_Linear Data 1": J3.A.1 U1.A.4 | length 324.8
  Top Layer w10: U1.A.4@4526.36,7235.04 4590.04,7235.04 4677.44,7322.44 J3.A.1@4815,7322.44
"Signal_In_Linear Data 2": J3.B.1 U1.B.4 | length 324.8
  Top Layer w10: U1.B.4@4526.36,6590.04 4590.04,6590.04 4677.44,6677.44 J3.B.1@4815,6677.44
"Signal_In_Van Atta Data": J3.C.1 U1.C.4 | length 324.8
  Top Layer w10: U1.C.4@4526.36,5942.6 4590.04,5942.6 4677.44,6030 J3.C.1@4815,6030
Switch_Out: LED1.2 R1.1 SW1.2 | length 953.3
  Top Layer w10: SW1.2@4541.57,1990 4541.57,2036.57 4560,2055 4785,2055 4810,2080 4810,2135 ; LED1.2@4677.36,2335 4568.79,2335 4560,2326.21 4560,2265 4595,2230 4765,2230 4810,2185 4810,2135 ; R1.1@4760,2135 4810,2135
"USRP_Van Atta Data": P2.1 R3.C.2 TP1.C.1 U5.A.1 U5.A.5 U5.B.1 U5.B.5 U5.C.1 U5.C.5 U5.D.1 U5.D.5 | length 9920.4
  Top Layer w5: v1@3668.44,5073.74 v1(3674.07,5079.37) ; v1@3680.04,3144.37 v1(3685.67,3150) ; v1@3687.64,6994.37 v1(3693.27,7000)
  Top Layer w10: U5.B.1@3613.4,4995 3672.77,4995 v1(3673.4,4994.37) ; U5.B.5@3613.4,5073.74 3640.98,5073.74 3646.61,5079.37 v1(3674.07,5079.37) ; U5.D.1@3620,1146.26 3647.57,1146.26 3648.83,1145 v1(3690,1145) ; U5.D.5@3620,1225 3647.57,1225 3652.57,1230 v1(3695,1230) ; U5.C.1@3625,3065.63 3684.37,3065.63 v1(3685,3065) ; U5.C.5@3625,3144.37 3652.57,3144.37 3658.2,3150 v1(3685.67,3150) ; U5.A.1@3632.6,6915.63 3691.97,6915.63 v1(3692.6,6915) ; U5.A.5@3632.6,6994.37 3660.17,6994.37 3665.8,7000 v1(3693.27,7000) ; v1(3990,6955) 3992.68,6952.32 3992.68,6943.21 3993.04,6942.85 ; 3993.75,6942.14 3993.75,6570 ; P2.1@4070,6570 3993.75,6570 ; v1(4160,1232.88) 4180,1252.88 v1(4180,3150) 4180,3980 3960,4200 3960,4935 v1(4130,5105) 4170,5145 4170,5990 3993.75,6166.25 3993.75,6250 ; R3.C.2@4434.88,6142.56 4397.48,6142.56 ; TP1.C.1@4565,6247.56 4427.56,6247.56 4397.48,6217.48 4397.48,6142.56 ; 3993.75,6250 3993.75,6570 ; 3993.75,6250 4067.5,6250 4067.5,6187.5 4112.44,6142.56 4397.48,6142.56
  Bottom Layer w10: v1(3673.4,4994.37) 3779.37,4994.37 3795,5010 3795,5080 ; v1(3674.07,5079.37) 3674.7,5080 3795,5080 ; v1(3685,3065) 3815,3065 3835,3085 3835,3150 ; v1(3685.67,3150) 3835,3150 ; v1(3690,1145) 3795.58,1145 3810,1159.42 3810,1231.75 ; v1(3692.6,6915) 3785,6915 3795,6925 3795,7000 ; v1(3693.27,7000) 3795,7000 ; v1(3695,1230) 3696.75,1231.75 3810,1231.75 ; v1(3990,6955) 3945,7000 3795,7000 ; v1(4130,5105) 3820,5105 3795,5080 ; v1(4160,1232.88) 4158.88,1231.75 3810,1231.75 ; v1(4180,3150) 3835,3150
"Van Atta": C8.A.1 C8.B.1 C8.C.1 C8.D.1 J2.1 P3.2 U5.A.8 U5.B.8 U5.C.8 U5.D.8 | length 354.3
  Top Layer w5: 3534.37,1163.98 3538.31,1163.98
  Top Layer w10: U5.B.8@3438.2,5034.37 3525.8,5034.37 ; U5.D.8@3444.8,1185.63 3532.4,1185.63 ; U5.C.8@3449.8,3105 3537.4,3105 ; U5.A.8@3457.4,6955 3545,6955
  other v1: 3580,1060 3625,1060 3555,1100 3600,1100 3580,2975 3630,2975 3560,3015 3605,3015 3555,3060 3568.4,4904.37 3618.4,4904.37 3548.4,4944.37 3593.4,4944.37 3543.4,4989.37 3587.6,6825 3637.6,6825 3567.6,6865 3612.6,6865 3562.6,6910
pads on no net: L1.A.2 L1.A.3 L1.A.6 L1.A.7 L1.B.2 L1.B.3 L1.B.6 L1.B.7 L1.C.2 L1.C.3 L1.C.6 L1.C.7 L1.D.2 L1.D.3 L1.D.6 L1.D.7 L2.A.2 L2.A.3 L2.A.6 L2.A.7 L2.B.2 L2.B.3 L2.B.6 L2.B.7 L2.C.2 L2.C.3 L2.C.6 L2.C.7 L2.D.2 L2.D.3 L2.D.6 L2.D.7 L3.A.1 L3.A.2 L3.A.3 L3.A.4 L3.A.6 L3.A.7 L3.B.1 L3.B.2 L3.B.3 L3.B.4 L3.B.6 L3.B.7 L3.C.1 L3.C.2 L3.C.3 L3.C.4 L3.C.6 L3.C.7 L3.D.1 L3.D.2 L3.D.3 L3.D.4 L3.D.6 L3.D.7 L4.A.1 L4.A.2 L4.A.3 L4.A.4 L4.A.6 L4.A.7 L4.B.1 L4.B.2 L4.B.3 L4.B.4 L4.B.6 L4.B.7 L4.C.1 L4.C.2 L4.C.3 L4.C.4 L4.C.6 L4.C.7 L4.D.1 L4.D.2 L4.D.3 L4.D.4 L4.D.6 L4.D.7 P1.3 P2.3 P3.3 U2.A.4 U2.B.4 U2.C.4 U2.D.4 U6.A.2 U6.A.4 U6.B.2 U6.B.4 U6.C.2 U6.C.4 U6.D.2 U6.D.4

## Polygon pours and split planes (outlines as drawn)
+3V on Top Layer "NONET_L01_P-001" (solid, pour order 106): 3093.27,6888.74 3093.27,6813.74 3195,6813.74 3195,7003.74 3105,7003.74 3105,6888.74
+3V on Top Layer "NONET_L01_P-001" (solid, pour order 80): 4190,6002.56 4485,6002.56 4485,6097.56 4190,6097.56
+3V on Top Layer "NONET_L01_P-001" (solid, pour order 81): 4190,6650 4485,6650 4485,6745 4190,6745
+3V on Top Layer "NONET_L01_P-001" (solid, pour order 82): 4190,7295 4485,7295 4485,7390 4190,7390
"Van Atta" on Top Layer "NONET_L01_P-001" (solid, pour order 110): 3505.28,6877.28 3505.28,6797.28 3590.28,6797.28 3590.28,6917.28 3539.76,6962.28 3502.4,6962.28 3502.4,6952.91 3534.11,6926.12 3534.11,6877.28
+3V on Top Layer "NONET_L01_P-001" (solid, pour order 78): 3424.92,3955 3424.92,3840 3424.92,3765.47 3424.92,3690 3694.92,3690 3734.92,3730 3754.92,3730 3754.92,3770 3659.96,3864.96 3575,3955
"Van Atta" on Top Layer "NONET_L01_P-001" (solid, pour order 102): 3490,1110 3490,1030 3575,1030 3575,1150 3524.48,1195 3487.13,1195 3487.13,1185.63 3518.84,1158.84 3518.84,1110
"Van Atta" on Top Layer "NONET_L01_P-001" (solid, pour order 103): 3565.67,1125 3645.67,1125 3645.67,1030 3565.67,1030
"Van Atta" on Top Layer "NONET_L01_P-001" (solid, pour order 112): 3497.68,3027.28 3497.68,2947.28 3582.68,2947.28 3582.68,3067.28 3532.16,3112.28 3494.8,3112.28 3494.8,3102.91 3526.52,3076.12 3526.52,3027.28
"Van Atta" on Top Layer "NONET_L01_P-001" (solid, pour order 109): 3568.35,3042.28 3648.35,3042.28 3648.35,2947.28 3568.35,2947.28
"Van Atta" on Top Layer "NONET_L01_P-001" (solid, pour order 108): 3556.75,4971.65 3636.75,4971.65 3636.75,4876.65 3556.75,4876.65
"Van Atta" on Top Layer "NONET_L01_P-001" (solid, pour order 111): 3486.08,4956.65 3486.08,4876.65 3571.08,4876.65 3571.08,4996.65 3520.56,5041.65 3483.2,5041.65 3483.2,5032.28 3514.92,5005.49 3514.92,4956.65
"Van Atta" on Top Layer "NONET_L01_P-001" (solid, pour order 107): 3575.95,6892.28 3655.95,6892.28 3655.95,6797.28 3575.95,6797.28
+3V on Top Layer "NONET_L01_P-001" (solid, pour order 105): 3093.27,4965 3093.27,4890 3195,4890 3195,5080 3105,5080 3105,4965
+3V on Top Layer "NONET_L01_P-001" (solid, pour order 104): 3088.27,3035 3088.27,2960 3190,2960 3190,3150 3100,3150 3100,3035
+3V on Top Layer "NONET_L01_P-001" (solid, pour order 101): 3083.27,1105 3083.27,1030 3185,1030 3185,1220 3095,1220 3095,1105
+3V on Top Layer "NONET_L01_P-001" (solid, pour order 76): 3404.92,7810 3404.92,7695 3404.92,7620.47 3404.92,7545 3674.92,7545 3714.92,7585 3734.92,7585 3734.92,7625 3639.96,7719.96 3555,7810
+3V on Top Layer "NONET_L01_P-001" (solid, pour order 99): 2815,1916 2815,1356 2860,1356 2860,1216 2730,1216 2730,1916
+3V on Top Layer "NONET_L01_P-001" (solid, pour order 95): 2812.5,5745 2812.5,5185 2857.5,5185 2857.5,5045 2727.5,5045 2727.5,5745
+3V on Top Layer "NONET_L01_P-001" (solid, pour order 96): 2810,4820 2810,4260 2855,4260 2855,4120 2725,4120 2725,4820
+3V on Top Layer "NONET_L01_P-001" (solid, pour order 100): 2810,975 2810,415 2855,415 2855,275 2725,275 2725,975
+3V on Top Layer "NONET_L01_P-001" (solid, pour order 98): 2810,2893.07 2810,2333.07 2855,2333.07 2855,2193.07 2725,2193.07 2725,2893.07
+3V on Top Layer "NONET_L01_P-001" (solid, pour order 97): 2815,3835 2815,3275 2860,3275 2860,3135 2730,3135 2730,3835
+3V on Top Layer "NONET_L01_P-001" (solid, pour order 94): 2810.08,6743.07 2810.08,6183.07 2855.08,6183.07 2855.08,6043.07 2725.08,6043.07 2725.08,6743.07
+3V on Top Layer "NONET_L01_P-001" (solid, pour order 93): 2815,7665 2815,7105 2860,7105 2860,6965 2730,6965 2730,7665
+3V on Top Layer "NONET_L01_P-001" (solid, pour order 79): 3424.92,2035 3424.92,1920 3424.92,1845.47 3424.92,1770 3694.92,1770 3734.92,1810 3754.92,1810 3754.92,1850 3659.96,1944.96 3575,2035
+3V on Top Layer "NONET_L01_P-001" (solid, pour order 77): 3420.54,5882.6 3420.54,5767.6 3420.54,5693.07 3420.54,5617.6 3690.54,5617.6 3730.54,5657.6 3750.54,5657.6 3750.54,5697.6 3655.57,5792.56 3570.61,5882.6
+3V on Int (PWR) "NONET_L01_P-001" (solid, pour order 115): 0,7845 5069.61,7845 5090,7824.61 5090,0 0,0
"Van Atta" on Int (PWR) "NONET_L01_P-001" (solid, pour order 91): 3381.88,5168.57 3381.88,4873.57 4165,4873.57 4165,5168.57
"Van Atta" on Int (PWR) "NONET_L01_P-001" (solid, pour order 86): 3750,4915 3990,4915 3990,3090 3760,3090 3750,3100
"Van Atta" on Int (PWR) "NONET_L01_P-001" (solid, pour order 88): 3950,4018.44 4165,4020.53 4165,4930 3950,4930
"Van Atta" on Int (PWR) "NONET_L01_P-001" (solid, pour order 114): 3945,4065 4995,4065 4995,2440 3945,2440
"Van Atta" on Int (PWR) "NONET_L01_P-001" (solid, pour order 92): 3369,3259.77 3369,2905 4159,2905 4159,3259.77
+3V on Int (PWR) "NONET_L01_P-001" (solid, pour order 85): 3980,4545 3980,4420 4285,4420 4285,4545
"Van Atta" on Int (PWR) "NONET_L01_P-001" (solid, pour order 113): 3370,1330 3370,990 4160,990 4160,1330
"Van Atta" on Int (PWR) "NONET_L01_P-001" (solid, pour order 90): 3366.94,7109.05 3366.94,6745 4167.5,6745 4167.5,7109.05
"Van Atta" on Int (PWR) "NONET_L01_P-001" (solid, pour order 87): 3875,5146.55 3990.71,5146.55 4162.51,5146.55 4167.51,6961.55 3875,6961.55
"Van Atta" on Int (PWR) "NONET_L01_P-001" (solid, pour order 89): 3931.04,990 4315,990 4315,2585 3938.7,2585
GND on Int (GND) "NONET_L01_P-001" (solid, pour order 83): 0,7845 5090,7845 5090,0 0,0

## Silkscreen, mask and mechanical layers (free items; w line width, h text height)
Top Overlay:
  drawing of 20 lines, arcs and shapes, not listed
  text "LD1" at 4110,7345 h60 r90
  text "N1+" at 828.36,7331.25 h60
  text "N1-" at 833.36,7011.25 h60
  text "LD2" at 4105,6710 h60 r90
  text "N2+" at 828.36,6616.25 h60
  text "N2-" at 833.36,6186.25 h60
  text "VA" at 4100,6055 h60 r90
  text "N1+" at 843.36,5401.25 h60
  text "N1-" at 848.36,5081.25 h60
  text "N2+" at 843.36,4686.25 h60
  text "3V+" at 4150,4660 h60 r90
  text "N2-" at 848.36,4256.25 h60
  text "N1+" at 838.36,3476.25 h60
  text "N1-" at 843.36,3156.25 h60
  text "Van Atta" at 4145,3155 h60 r90
  text "N2+" at 838.36,2761.25 h60
  text "N2-" at 843.36,2331.25 h60
  text "Designed by:" at 4000,1644.99 h60
  text "Nick Hougardy and" at 4000,1544.99 h60
  text "N1+" at 825,1540 h60
  text "Carlos Sanchez" at 4005,1445 h60
  text "N1-" at 830,1220 h60
  text "N2+" at 825,825 h60
  text "N2-" at 830,395 h60
Mechanical 1:
  the board outline again, w10